# EAGLE board CouplerDC_R5_1pt6mm_No_Dims (EAGLE 8.2.2)
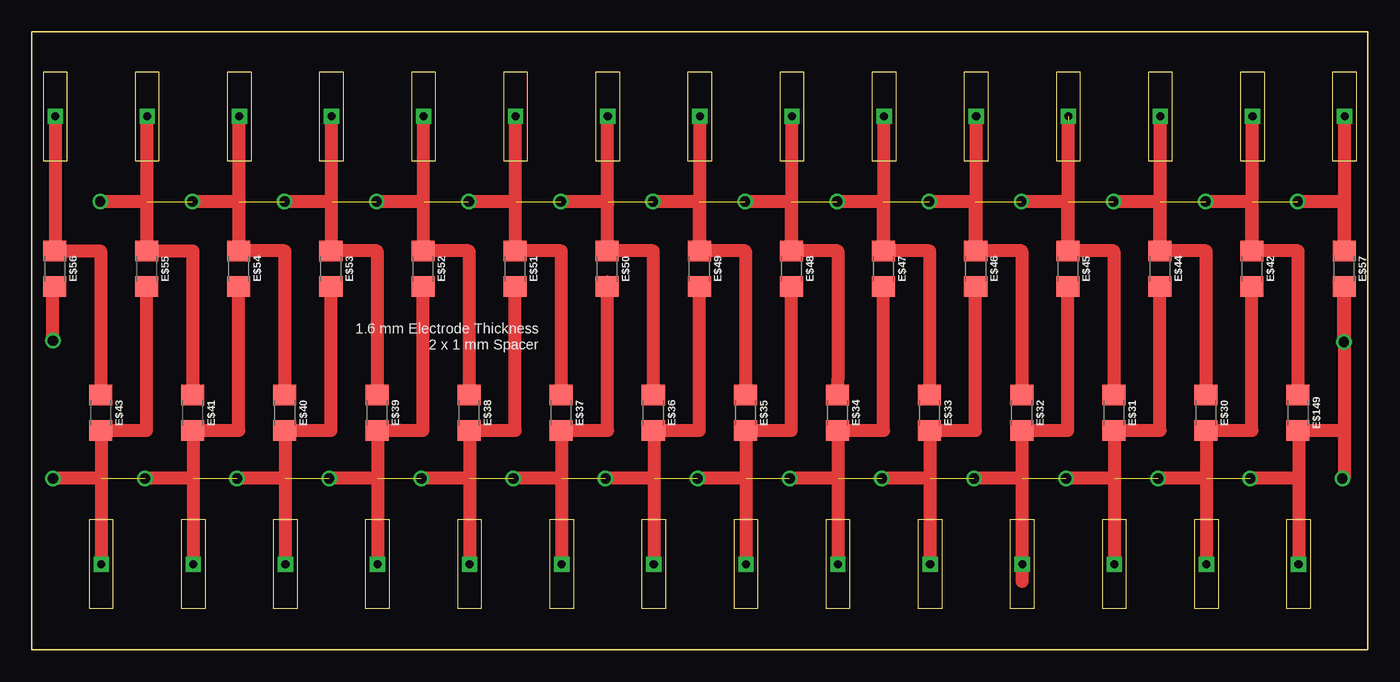
[diagram p0: board, top side]

Size 104.4 x 48.26 mm. Coordinates in mm from the lower left corner, seen from the top.
Outline: 0,48.26 0,0 104.4,0 104.4,48.26 0,48.26
Copper layers (1*16): Top 0.035mm / dielectric 1.5mm / Bottom 0.035mm
Design rules "default": minimum track width 10mil, minimum drill 24mil, track to track 8mil, track to pad 8mil, pad to pad 8mil, via to via 8mil, smd to smd 8mil, copper to edge 40mil, drill to drill 8mil, minimum pad ring 10mil, minimum via ring 8mil, stop-mask expansion 4mil, vias tented up to drill 0mil, thermal gap 10mil

## Footprints (pad centres in the part's own frame; a part is rotated, then mirrored left to right if it is on the bottom)
GAAEXTENSIONS_SLOT2 = drill 0.635 pad 1.194 square: P$1 0,0
1206 = smd 1.6 x 1.8: 1 -1.4,0; 2 1.4,0

## Placement (x,y rotation side)
E$2  [GAAEXTENSIONS_SLOT2]  5.41,6.67 90 top
E$3  [GAAEXTENSIONS_SLOT2]  9.01,41.67 90 top
E$4  [GAAEXTENSIONS_SLOT2]  16.21,41.67 90 top
E$5  [GAAEXTENSIONS_SLOT2]  23.41,41.67 90 top
E$6  [GAAEXTENSIONS_SLOT2]  30.61,41.67 90 top
E$7  [GAAEXTENSIONS_SLOT2]  37.81,41.67 90 top
E$8  [GAAEXTENSIONS_SLOT2]  45.01,41.67 90 top
E$9  [GAAEXTENSIONS_SLOT2]  52.21,41.67 90 top
E$10  [GAAEXTENSIONS_SLOT2]  59.41,41.67 90 top
E$11  [GAAEXTENSIONS_SLOT2]  66.61,41.67 90 top
E$12  [GAAEXTENSIONS_SLOT2]  73.81,41.67 90 top
E$13  [GAAEXTENSIONS_SLOT2]  81.01,41.67 90 top
E$14  [GAAEXTENSIONS_SLOT2]  88.21,41.67 90 top
E$15  [GAAEXTENSIONS_SLOT2]  95.41,41.67 90 top
E$16  [GAAEXTENSIONS_SLOT2]  12.61,6.67 90 top
E$17  [GAAEXTENSIONS_SLOT2]  19.81,6.67 90 top
E$18  [GAAEXTENSIONS_SLOT2]  27.01,6.67 90 top
E$19  [GAAEXTENSIONS_SLOT2]  34.21,6.67 90 top
E$20  [GAAEXTENSIONS_SLOT2]  41.41,6.67 90 top
E$21  [GAAEXTENSIONS_SLOT2]  48.61,6.67 90 top
E$22  [GAAEXTENSIONS_SLOT2]  55.81,6.67 90 top
E$23  [GAAEXTENSIONS_SLOT2]  63.01,6.67 90 top
E$24  [GAAEXTENSIONS_SLOT2]  70.21,6.67 90 top
E$25  [GAAEXTENSIONS_SLOT2]  77.41,6.67 90 top
E$26  [GAAEXTENSIONS_SLOT2]  84.61,6.67 90 top
E$27  [GAAEXTENSIONS_SLOT2]  91.81,6.67 90 top
E$28  [GAAEXTENSIONS_SLOT2]  99.01,6.67 90 top
E$29  [GAAEXTENSIONS_SLOT2]  102.61,41.67 90 top
E$30  [1206]  91.77,18.5 270 top
E$31  [1206]  84.57,18.5 270 top
E$32  [1206]  77.37,18.5 270 top
E$33  [1206]  70.17,18.5 270 top
E$34  [1206]  62.97,18.5 270 top
E$35  [1206]  55.77,18.5 270 top
E$36  [1206]  48.57,18.5 270 top
E$37  [1206]  41.37,18.5 270 top
E$38  [1206]  34.17,18.5 270 top
E$39  [1206]  26.97,18.5 270 top
E$40  [1206]  19.77,18.5 270 top
E$41  [1206]  12.57,18.5 270 top
E$42  [1206]  95.37,29.76 270 top
E$43  [1206]  5.37,18.5 270 top
E$44  [1206]  88.17,29.76 270 top
E$45  [1206]  80.97,29.76 270 top
E$46  [1206]  73.77,29.76 270 top
E$47  [1206]  66.57,29.76 270 top
E$48  [1206]  59.37,29.76 270 top
E$49  [1206]  52.17,29.76 270 top
E$50  [1206]  44.97,29.76 270 top
E$51  [1206]  37.77,29.76 270 top
E$52  [1206]  30.57,29.76 270 top
E$53  [1206]  23.37,29.76 270 top
E$54  [1206]  16.17,29.76 270 top
E$55  [1206]  8.97,29.76 270 top
E$56  [1206]  1.77,29.76 270 top
E$57  [1206]  102.57,29.76 270 top
E$149  [1206]  98.97,18.5 270 top
S$1  [GAAEXTENSIONS_SLOT2]  1.81,41.67 90 top

## Library data of the parts
E$2-E$29 S$1 = SLOTS
E$30-E$57 E$149 = SparkFun-Resistors

## Nets
S$1: E$43.1 E$56.1
S$11: E$2.P$1 E$16.P$1 E$17.P$1 E$18.P$1 E$19.P$1 E$20.P$1 E$21.P$1 E$22.P$1 E$23.P$1 E$24.P$1 E$25.P$1 E$26.P$1 E$27.P$1 E$28.P$1 E$30.2 E$31.2 E$32.2 E$33.2 E$34.2 E$35.2 E$36.2 E$37.2 E$38.2 E$39.2 E$40.2 E$41.2 E$42.2 E$43.2 E$44.2 E$45.2 E$46.2 E$47.2 E$48.2 E$49.2 E$50.2 E$51.2 E$52.2 E$53.2 E$54.2 E$55.2 E$57.2 E$149.2
S$12: E$3.P$1 E$4.P$1 E$5.P$1 E$6.P$1 E$7.P$1 E$8.P$1 E$9.P$1 E$10.P$1 E$11.P$1 E$12.P$1 E$13.P$1 E$14.P$1 E$15.P$1 E$29.P$1 E$30.1 E$31.1 E$32.1 E$33.1 E$34.1 E$35.1 E$36.1 E$37.1 E$38.1 E$39.1 E$40.1 E$41.1 E$42.1 E$44.1 E$45.1 E$46.1 E$47.1 E$48.1 E$49.1 E$50.1 E$51.1 E$52.1 E$53.1 E$54.1 E$55.1 E$57.1 E$149.1

## Tracks (layer width: path | path; a pad name or v marks a point on that pad's centre or on a via)
S$1
  Top 1.016: 1.8,41.66 1.8,31.2 E$56.1 5.37,31.16 E$43.1
S$10  (via drill 0.8)
  Top 1.016: v1.63,24.14 1.63,28.33 1.54,28.33
S$11  (via drill 0.8)  (13 unrouted)
  Top 1.016: E$55.2 8.97,17.1 E$43.2 5.4,17.1 5.4,13.38 | 5.4,13.38 5.4,7.12 5.41,7.12 E$2.P$1 | E$54.2 16.17,17.1 E$41.2 12.61,17.1 12.61,13.38 | 12.61,13.38 E$16.P$1 | E$53.2 23.37,17.1 E$40.2 19.81,17.1 19.81,13.38 | 19.81,13.38 E$17.P$1 | E$52.2 30.57,17.1 E$39.2 27.01,17.1 27.01,13.38 | 27.01,13.38 E$18.P$1 | E$51.2 37.77,17.1 E$38.2 34.21,17.1 34.21,13.38 | 34.21,13.38 E$19.P$1 | E$50.2 44.97,28.72 45,28.72 45,17.1 E$37.2 41.41,17.1 41.41,13.38 | 41.41,13.38 E$20.P$1 | E$49.2 52.17,17.1 E$36.2 48.61,17.1 48.61,13.38 | 48.61,13.38 E$21.P$1 | E$48.2 59.37,17.1 E$35.2 55.81,17.1 55.81,13.38 | 55.81,13.38 E$22.P$1 | E$47.2 66.57,17.1 E$34.2 63.01,17.1 63.01,13.38 | 63.01,13.38 E$23.P$1 | E$46.2 73.77,17.1 E$33.2 70.21,17.1 70.21,13.38 | 70.21,13.38 E$24.P$1 | E$45.2 80.97,17.1 E$32.2 77.4,17.1 77.4,13.38 | E$25.P$1 77.41,5.32 77.4,5.32 77.4,13.38 | E$44.2 88.17,17.1 E$31.2 84.61,17.1 84.61,13.38 | 84.61,13.38 E$26.P$1 | E$42.2 95.37,17.1 E$30.2 91.81,17.1 91.81,13.38 | 91.81,13.38 E$27.P$1 | 99.01,13.38 99.01,17.1 E$149.2 102.57,17.1 | 99.01,13.38 E$28.P$1 | 99.01,13.38 v95.23,13.38 | 91.81,13.38 v88.03,13.38 | 84.61,13.38 v80.83,13.38 | 77.4,13.38 v73.63,13.38 | 70.21,13.38 v66.43,13.38 | 63.01,13.38 v59.23,13.38 | 55.81,13.38 v52.03,13.38 | 48.61,13.38 v44.83,13.38 | 41.41,13.38 v37.63,13.38 | 34.21,13.38 v30.43,13.38 | 27.01,13.38 v23.23,13.38 | 19.81,13.38 v16.03,13.38 | 12.61,13.38 v8.83,13.38 | 102.57,17.1 102.57,13.38 v102.43,13.38 | 5.4,13.38 v1.63,13.38 | 102.57,17.1 E$57.2 102.54,26.84 v102.55,24.04
S$12  (via drill 0.8)  (14 unrouted)
  Top 1.016: E$41.1 12.57,31.16 E$55.1 8.97,35 | E$3.P$1 8.97,41.67 8.97,35 | E$40.1 19.77,31.16 E$54.1 16.21,31.16 16.21,35.07 | 16.21,35.07 E$4.P$1 | E$39.1 26.97,31.16 E$53.1 23.41,31.16 23.41,34.93 | 23.41,34.93 E$5.P$1 | E$38.1 34.17,31.16 E$52.1 30.61,31.16 30.61,34.71 | 30.61,34.71 E$6.P$1 | E$37.1 41.37,31.16 E$51.1 37.8,31.16 37.8,34.85 | 37.8,34.85 37.8,41.32 37.81,41.32 E$7.P$1 | E$36.1 48.57,31.16 E$50.1 45.01,31.16 45.01,34.78 | 45.01,34.78 E$8.P$1 | E$49.1 55.77,31.16 E$35.1 | E$49.1 52.21,31.16 E$9.P$1 | E$48.1 63,31.16 63,21.06 62.97,21.06 E$34.1 | E$48.1 59.41,31.16 E$10.P$1 | E$47.1 70.17,31.16 E$33.1 | E$47.1 66.61,31.16 E$11.P$1 | E$46.1 77.37,31.16 E$32.1 | E$46.1 73.81,31.16 E$12.P$1 | E$45.1 84.57,31.16 E$31.1 | E$45.1 81,31.16 81,41.32 | E$44.1 91.77,31.16 E$30.1 | E$44.1 88.21,31.16 E$14.P$1 | E$42.1 98.97,31.16 E$149.1 | E$42.1 95.41,31.16 E$15.P$1 | E$29.P$1 102.57,41.67 E$57.1 | E$57.1 102.57,31.31 | E$57.1 102.57,35.01 v98.94,35.01 | E$42.1 95.37,35.01 v91.74,35.01 | E$44.1 88.17,35.01 v84.54,35.01 | E$45.1 80.97,35.01 v77.34,35.01 | E$46.1 73.77,35.01 v70.14,35.01 | E$47.1 66.57,35.01 v62.94,35.01 | E$48.1 59.37,35.01 v55.74,35.01 | E$49.1 52.17,35.01 v48.54,35.01 | 45.01,34.78 45.01,35.01 v41.34,35.01 | 37.8,34.85 37.8,35.01 v34.14,35.01 | 30.61,34.71 30.61,35.01 v26.94,35.01 | 23.41,34.93 23.41,35.01 v19.74,35.01 | 16.21,35.07 16.21,35.01 v12.54,35.01 | 8.97,35 8.97,35.01 v5.34,35.01

## Text on the board
tPlace: 1.6 mm Electrode Thickness / 2 x 1 mm Spacer